# EAGLE board Clementina-Main (EAGLE 7.7.0)
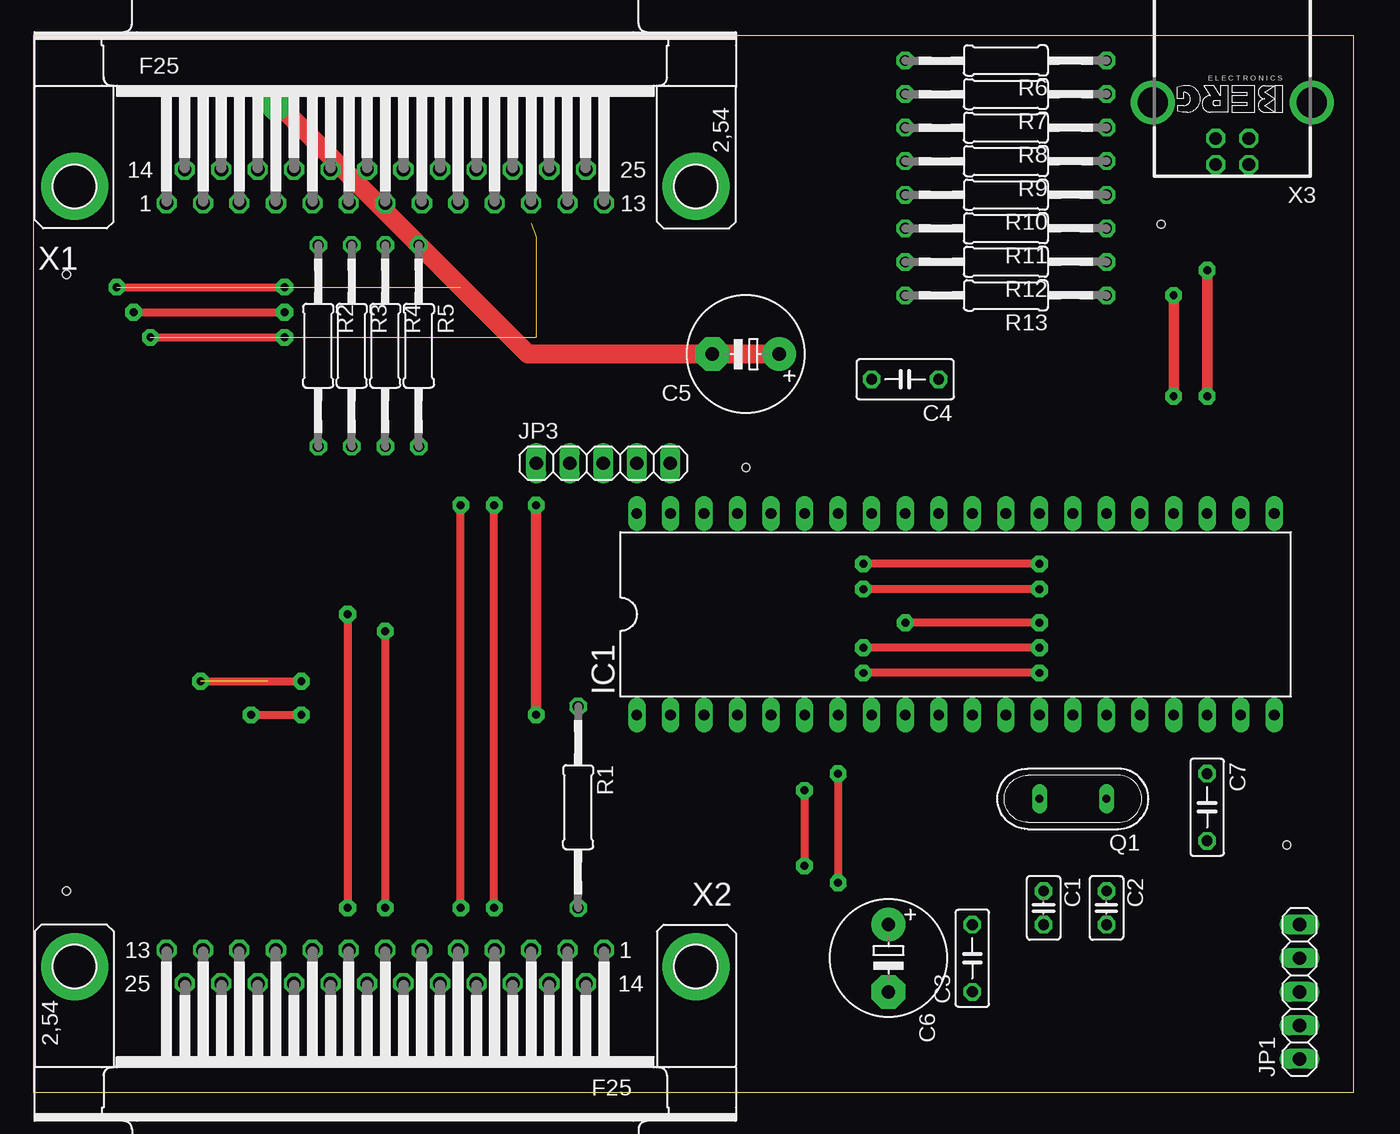
[diagram p0: board, top side]
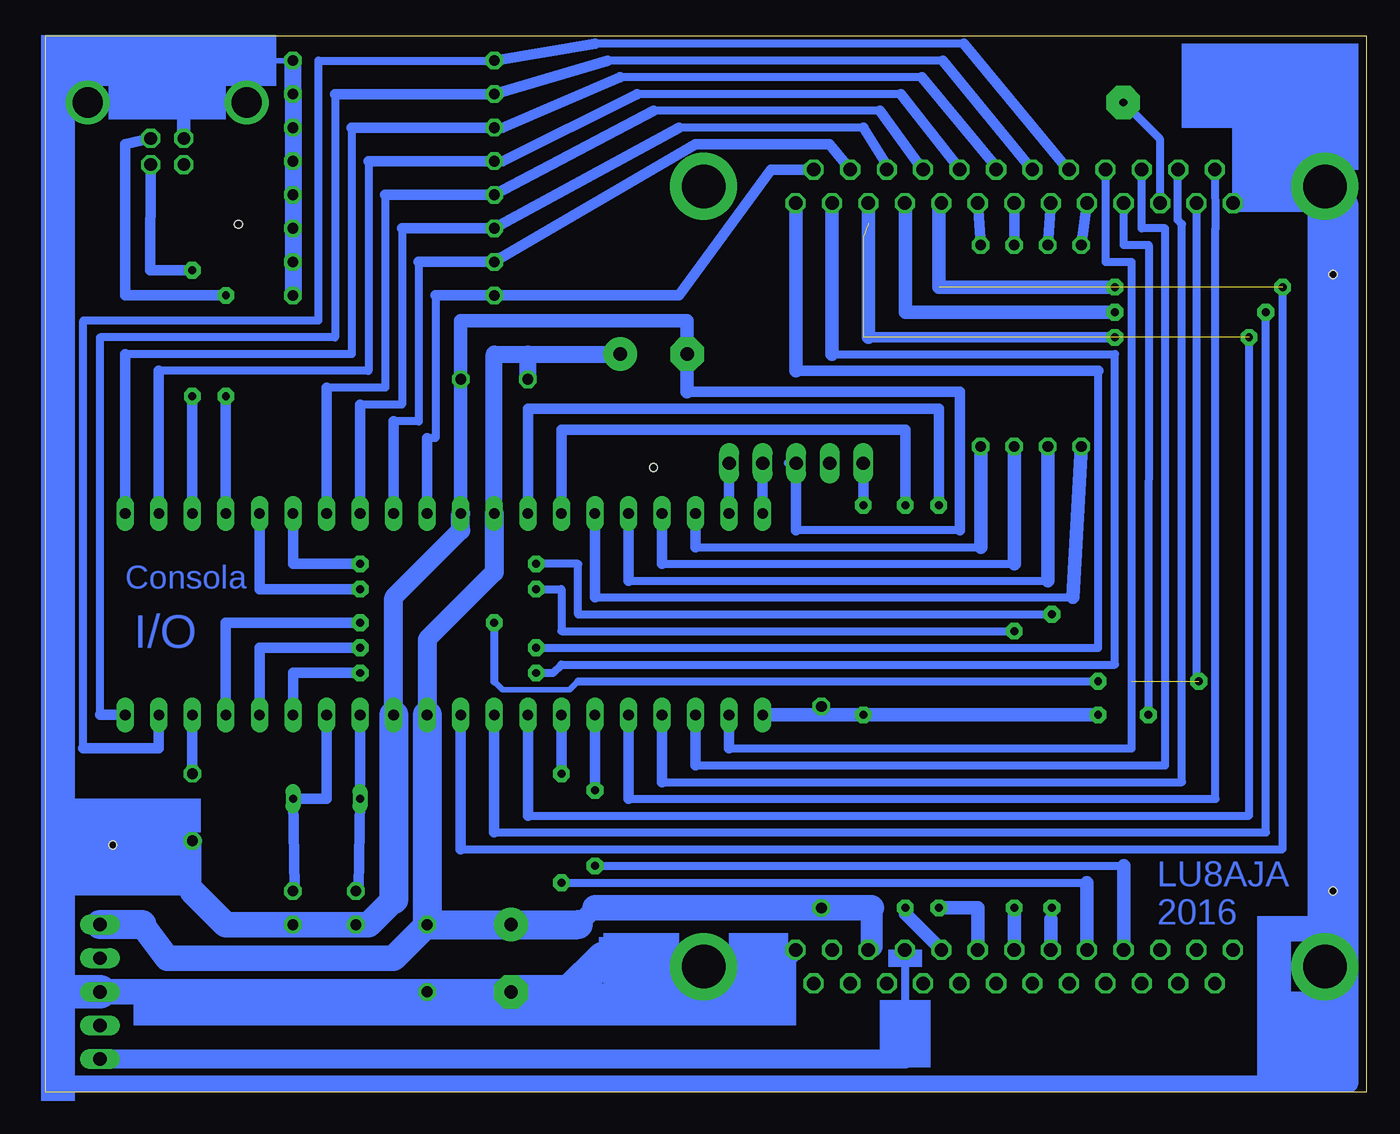
[diagram p1: board, bottom side, seen from below]

Size 100 x 80 mm. Coordinates in mm from the lower left corner, seen from the top.
Outline: 0,0 100,0 100,80 0,80 0,0
Copper layers (1*16): Top 0.035mm / dielectric 1.5mm / Bottom 0.035mm
Design rules "default": minimum track width 10mil, minimum drill 24mil, track to track 8mil, track to pad 8mil, pad to pad 8mil, via to via 8mil, smd to smd 8mil, copper to edge 40mil, drill to drill 8mil, minimum pad ring 10mil, minimum via ring 8mil, stop-mask expansion 4mil, vias tented up to drill 0mil, thermal gap 10mil
Holes 0.6 mm at 2.54,61.91 2.54,15.24 94.93,18.73 85.41,65.72 53.98,47.31

## Footprints (pad centres in the part's own frame; a part is rotated, then mirrored left to right if it is on the bottom)
C025-025X050 = drill 0.813 octagon: 1 -1.27,0; 2 1.27,0
C050-025X075 = drill 0.813 octagon: 1 -2.54,0; 2 2.54,0
C050-030X075 = drill 0.813 octagon: 1 -2.54,0; 2 2.54,0
E5-8,5 = drill 1.016 pad 2.54: + -2.54,0 | drill 1.016 pad 2.54 octagon: - 2.54,0
DIL40 = drill 0.813 long: 1 -24.13,-7.62; 2 -21.59,-7.62; 3 -19.05,-7.62; 4 -16.51,-7.62; 5 -13.97,-7.62; 6 -11.43,-7.62; 7 -8.89,-7.62; 8 -6.35,-7.62; 9 -3.81,-7.62; 10 -1.27,-7.62; 11 1.27,-7.62; 12 3.81,-7.62; 13 6.35,-7.62; 14 8.89,-7.62; 15 11.43,-7.62; 16 13.97,-7.62; 17 16.51,-7.62; 18 19.05,-7.62; 19 21.59,-7.62; 20 24.13,-7.62; 21 24.13,7.62; 22 21.59,7.62; 23 19.05,7.62; 24 16.51,7.62; 25 13.97,7.62; 26 11.43,7.62; 27 8.89,7.62; 28 6.35,7.62; 29 3.81,7.62; 30 1.27,7.62; 31 -1.27,7.62; 32 -3.81,7.62; 33 -6.35,7.62; 34 -8.89,7.62; 35 -11.43,7.62; 36 -13.97,7.62; 37 -16.51,7.62; 38 -19.05,7.62; 39 -21.59,7.62; 40 -24.13,7.62
1X05 = drill 1.016 long: 1 -5.08,0; 2 -2.54,0; 3 0,0; 4 2.54,0; 5 5.08,0
QS = drill 0.61 long: 1 -2.54,0; 2 2.54,0
0207/15 = drill 0.813 octagon: 1 -7.62,0; 2 7.62,0
F25HP = drill 1.016 octagon: 1 -16.561,-1.27; 2 -13.792,-1.27; 3 -11.049,-1.27; 4 -8.28,-1.27; 5 -5.512,-1.27; 6 -2.769,-1.27; 7 0,-1.27; 8 2.769,-1.27; 9 5.512,-1.27; 10 8.28,-1.27; 11 11.049,-1.27; 12 13.792,-1.27; 13 16.561,-1.27; 14 -15.189,1.27; 15 -12.421,1.27; 16 -9.652,1.27; 17 -6.909,1.27; 18 -4.14,1.27; 19 -1.372,1.27; 20 1.372,1.27; 21 4.14,1.27; 22 6.909,1.27; 23 9.652,1.27; 24 12.421,1.27; 25 15.189,1.27 | drill 3.302 pad 5.08: G1 -23.52,0; G2 23.52,0
PN61729-S = drill 0.95 octagon: 1 1.25,4.71; 2 -1.25,4.71; 3 -1.25,2.71; 4 1.25,2.71 | drill 2.3 pad 2.9: S1 -6.02,0; S2 6.02,0

## Placement (x,y rotation side)
C1  [C025-025X050]  76.52,13.97 270 top
C2  [C025-025X050]  81.28,13.97 270 top
C3  [C050-025X075]  71.12,10.16 90 top
C4  [C050-030X075]  66.04,53.98 180 top
C5  [E5-8,5]  53.98,55.88 180 top
C6  [E5-8,5]  64.77,10.16 270 top
C7  [C050-025X075]  88.9,21.59 270 top
IC1  PIC18F4550_40  [DIL40]  69.85,36.2 0 top
JP1  [1X05]  95.89,7.62 90 top
JP3  [1X05]  43.18,47.62 0 top
Q1  [QS]  78.74,22.23 180 top
R1  [0207/15]  41.27,21.59 270 top
R2  [0207/15]  21.59,56.52 270 top
R3  [0207/15]  24.13,56.52 270 top
R4  [0207/15]  26.67,56.52 270 top
R5  [0207/15]  29.21,56.52 270 top
R6  [0207/15]  73.66,78.11 180 top
R7  [0207/15]  73.66,75.56 180 top
R8  [0207/15]  73.66,73.03 180 top
R9  [0207/15]  73.66,70.48 180 top
R10  [0207/15]  73.66,67.94 180 top
R11  [0207/15]  73.66,65.41 180 top
R12  [0207/15]  73.66,62.87 180 top
R13  [0207/15]  73.66,60.33 180 top
X1  [F25HP]  26.67,68.58 0 top
X2  [F25HP]  26.67,9.53 180 top
X3  PN61729-S  [PN61729-S]  90.81,74.93 180 top

## Library data of the parts
C1-C3 C5-C7 R1-R13 = rcl
C4 = resistor
IC1 = microchip; MF: MICROCHIP; MPN: PIC18F4550-I/P; OC_FARNELL: 9321357; OC_NEWARK: 74K8623
JP1 JP3 = pinhead
Q1 = special
X1 X2 = con-subd; OC_FARNELL: unknown; OC_NEWARK: unknown
X3 = con-berg; OC_FARNELL: unknown; OC_NEWARK: unknown

## Nets
+5V: C3.2 C4.2 C5.+ C6.+ IC1.11 IC1.32 JP1.5 R1.2 X1.3 X2.3
GND: C1.2 C2.2 C3.1 C4.1 C5.- C6.- C7.2 IC1.12 IC1.31 JP1.3 JP3.3 R6.1 R7.1 R8.1 R9.1 R10.1 R11.1 R12.1 R13.1 X1.1 X2.1 X3.4 X3.S2
N$1: IC1.19 R6.2 X1.18
N$2: C2.1 IC1.14 Q1.1
N$3: IC1.1 JP3.1 R1.1 X1.4
N$4: IC1.8 X1.11
N$5: IC1.9 X1.10
N$6: IC1.10 X1.9
N$7: IC1.2 X1.17
N$8: IC1.3 X1.16
N$9: IC1.4 X1.15
N$10: IC1.5 X1.14
N$11: IC1.15 X1.12
N$12: C1.1 IC1.13 Q1.2
N$13: IC1.16 X1.13
N$14: IC1.17 X1.2
N$15: C7.1 IC1.18
N$16: IC1.20 R7.2 X1.19
N$17: IC1.21 R8.2 X1.20
N$18: IC1.22 R9.2 X1.21
N$19: IC1.27 R10.2 X1.22
N$20: IC1.28 R11.2 X1.23
N$21: IC1.29 R12.2 X1.24
N$22: IC1.30 R13.2 X1.25
N$23: IC1.35 R2.2
N$24: IC1.36 R3.2
N$25: IC1.37 R4.2
N$26: IC1.38 R5.2
N$27: IC1.24 X3.3
N$28: IC1.6 X2.10
N$29: IC1.7 X2.9
N$30: IC1.34 X2.5
N$31: IC1.33 X2.6
N$32: IC1.26 X2.8
N$33: IC1.25 X2.7
N$34: IC1.23 X3.2
N$35: JP1.1 X2.4
N$36: R5.1 X1.8
N$37: R4.1 X1.7
N$38: R3.1 X1.6
N$39: R2.1 X1.5
N$53: IC1.39 JP3.5
N$54: IC1.40 JP3.4

## Tracks (layer width: path | path; a pad name or v marks a point on that pad's centre or on a via)
+5V  (via drill 0.6 pad 2.54)
  Top 1.422: C5.+ 37.47,55.88 v18.41,74.93
  Bottom 0.61: X1.3 15.62,72.14 v18.41,74.93
  Bottom 1.27: IC1.32 66.04,55.88 63.5,55.88 | 63.5,55.88 C5.+ | C4.2 63.5,55.88
  Bottom 1.422: IC1.32 66.04,39.37 71.12,34.29 IC1.11 | 59.69,12.7 58.42,13.97 | 37.47,11.05 X2.3
  Bottom 1.676: 37.47,13.97 37.47,11.05
  Bottom 1.93: C3.2 73.66,10.16 90.81,10.16 92.71,12.7 | 58.42,13.97 R1.2 37.47,13.97
  Bottom 2.184: IC1.11 C3.2 C6.+ 59.69,12.7 | 92.71,12.7 JP1.5
GND
  Bottom 0.406: R6.1 85.09,78.11 | 85.09,78.11 89.53,78.11 99.06,78.11 | X3.S2 84.78,77.8 85.09,78.11 | 43.87,10.16 43.87,10.11 46.99,6.99 | 60.33,6.99 60.96,7.62 | C4.1 IC1.31
  Bottom 0.61: 30.8,42.55 43.18,42.55 | JP3.3 43.81,47.62
  Bottom 0.813: IC1.31 68.58,44.45 | 51.44,53.02 30.8,53.02 30.8,42.55 | 43.18,42.55 JP3.3
  Bottom 1.016: 68.58,44.45 C4.1 68.58,58.42 51.44,58.42 C5.- 51.44,53.02 | X3.4 89.56,78.08 89.53,78.11
  Bottom 1.27: X1.1 1.27,67.31 1.27,0.64 99.06,0.64 99.06,10.79 | R13.1 R12.1 R11.1 R10.1 R9.1 R8.1 R7.1 R6.1 | 99.06,78.11 99.06,19.05 99.06,13.97
  Bottom 1.422: 60.96,7.62 60.33,7.62 | 43.87,10.16 X2.1 | 98.42,7.62 99.06,8.26 99.06,10.79 99.06,13.97 | IC1.31 68.58,42.55 73.66,37.47 IC1.12 | 88.9,15.24 C7.2 99.06,19.05
  Bottom 1.93: C6.- C3.1 JP1.3 | 73.66,14.61 75.56,12.7 C1.2 C2.2 86.36,12.7 88.9,15.24
  Bottom 2.184: IC1.12 73.66,14.61
  Bottom 2.54: C6.- 60.96,7.62 | 60.33,7.62 57.78,10.16 | 46.99,6.99 60.33,6.99 | JP1.3 98.42,7.62
N$1
  Bottom 0.61: X1.18 22.86,70.18 | 30.48,79.38 58.42,79.38 | 97.16,26.04 97.16,58.42 79.38,58.42 79.38,78.11 R6.2
  Bottom 0.813: 22.86,70.18 30.48,79.38 | 58.42,79.38 R6.2 | IC1.19 91.44,26.04 97.16,26.04
N$2
  Bottom 0.813: IC1.14 78.74,22.23 Q1.1 81.15,15.37 C2.1
N$3  (via drill 0.6 pad 1.27)
  Top 0.61: v16.51,28.57 v20.32,28.57
  Top 0.813: v38.1,28.57 v38.1,44.45
  Bottom 0.61: v16.51,28.57 16.48,64.14 18.39,64.14 X1.4
  Bottom 0.813: v38.1,44.45 JP3.1 | 41.27,28.57 R1.1
  Bottom 1.016: IC1.1 41.27,28.57 v38.1,28.57 v20.32,28.57
N$4  (via drill 0.6 pad 1.27)  (3 unrouted)
  Top 0.61: v8.89,57.15 v19.05,57.15
  Bottom 0.61: 63.5,20.95 8.89,20.95 v8.89,57.15
  Bottom 0.813: IC1.8 63.5,20.95 | 37.72,57.15 v19.05,57.15
  Bottom 1.016: X1.11 37.72,57.15
N$5  (via drill 0.6 pad 1.27)
  Top 0.61: v7.62,59.05 v19.05,59.05
  Bottom 0.61: 66.04,19.68 7.62,19.68 v7.62,59.05 | 34.92,67.31 X1.10
  Bottom 0.813: IC1.9 66.04,19.68
  Bottom 1.016: 34.92,67.31 34.92,59.05 v19.05,59.05
N$6  (via drill 0.6 pad 1.27)  (1 unrouted)
  Top 0.61: v6.35,60.96 v19.05,60.96
  Bottom 0.61: 68.58,18.41 6.35,18.41 v6.35,60.96 | X1.9 32.38,67.11
  Bottom 0.813: IC1.10 68.58,18.41
  Bottom 1.016: 32.38,67.11 32.38,60.96 v19.05,60.96
N$7
  Bottom 0.61: 48.26,26.04 17.78,26.04 17.78,62.87 19.76,62.87 X1.17
  Bottom 0.813: IC1.2 48.26,26.04
N$8
  Bottom 0.61: 50.8,24.77 15.24,24.77 15.24,65.41 17.02,65.41 X1.16
  Bottom 0.813: IC1.3 50.8,24.77
N$9
  Bottom 0.61: 53.34,23.5 13.97,23.5 13.97,65.72 14.29,66.04 14.29,69.81 X1.15
  Bottom 0.813: IC1.4 53.34,23.5
N$10
  Bottom 0.61: 55.88,22.23 11.43,22.23 11.43,65.41 X1.14
  Bottom 0.813: IC1.5 55.88,22.23
N$11  (via drill 0.6 pad 1.27)
  Top 0.61: v76.2,31.75 v62.87,31.75
  Bottom 0.61: v62.87,31.75 61.59,31.75 60.96,32.38 19.05,32.38 19.05,55.88 40.46,55.88
  Bottom 0.813: IC1.15 81.28,31.75 v76.2,31.75
  Bottom 1.016: X1.12 40.46,55.88
N$12
  Bottom 0.813: IC1.13 Q1.2 76.33,15.43 C1.1
N$13  (via drill 0.6 pad 1.27)
  Top 0.61: v76.2,33.66 v62.87,33.66
  Bottom 0.61: v62.87,33.66 20.32,33.66 20.32,54.61 | 43.18,67.26 X1.13
  Bottom 0.813: IC1.16 83.82,33.66 v76.2,33.66 | 20.32,54.61 43.18,54.61
  Bottom 1.016: 43.18,54.61 43.18,67.26
N$14  (via drill 0.6 pad 1.27)  (1 unrouted)
  Top 0.61: v76.2,35.56 v66.04,35.56 | v12.7,31.11 v20.32,31.11
  Bottom 0.406: 66.04,31.11 65.41,30.48 60.33,30.48 59.69,31.11
  Bottom 0.61: v66.04,35.56 66.04,31.11 | X1.2 12.88,31.11 v12.7,31.11 | 59.69,31.11 v20.32,31.11
  Bottom 0.813: IC1.17 86.36,35.56 v76.2,35.56
N$15
  Bottom 0.813: IC1.18 C7.1
N$16
  Bottom 0.61: X1.19 25.4,69.95 | 32.07,78.11 57.47,78.11 | 95.89,28.57 95.89,57.15 78.11,57.15 78.11,75.56
  Bottom 0.813: 25.4,69.95 32.07,78.11 | 57.47,78.11 R7.2 78.11,75.56 | IC1.20 95.89,28.57
N$17
  Bottom 0.406: 65.41,73.03 R8.2
  Bottom 0.61: X1.20 27.94,69.95 | 33.66,76.83 56.52,76.83 | 76.83,73.03 76.83,55.88 93.98,55.88
  Bottom 0.813: 27.94,69.95 33.66,76.83 | 56.52,76.83 65.41,73.03 | IC1.21 93.98,55.88 | 76.83,73.03 R8.2
N$18
  Bottom 0.406: 65.41,70.48 R9.2
  Bottom 0.61: X1.21 30.8,69.86 | 35.24,75.56 55.24,75.56 | 75.56,70.48 75.56,54.61 91.44,54.61
  Bottom 0.813: 30.8,69.86 35.24,75.56 | 55.24,75.56 65.41,70.48 | IC1.22 91.44,54.61 | 75.56,70.48 R9.2
N$19
  Bottom 0.61: X1.22 33.66,69.93 | 36.83,74.3 53.98,74.3 | 74.3,67.94 74.3,53.34 78.74,53.34
  Bottom 0.813: 33.66,69.93 36.83,74.3 | 53.98,74.3 R10.2 74.3,67.94 | 78.74,53.34 IC1.27
N$20
  Bottom 0.61: X1.23 36.2,69.98 | 38.1,73.03 52.07,73.03 | 73.03,65.41 73.03,52.07 76.2,52.07
  Bottom 0.813: 36.2,69.98 38.1,73.03 | 52.07,73.03 R11.2 73.03,65.41 | 76.2,52.07 IC1.28
N$21
  Bottom 0.61: 71.75,62.87 71.75,50.8 73.66,50.8
  Bottom 0.813: X1.24 40.68,71.75 50.8,71.75 R12.2 71.75,62.87 | 73.66,50.8 IC1.29
N$22
  Bottom 0.61: 70.48,60.33 70.48,49.53 71.12,49.53
  Bottom 0.813: X1.25 45.09,69.85 52.07,60.33 R13.2 70.48,60.33 | 71.12,49.53 IC1.30
N$23
  Bottom 0.61: 58.42,37.47 22.23,37.47
  Bottom 0.813: IC1.35 58.42,37.47
  Bottom 1.016: 22.23,37.47 R2.2
N$24
  Bottom 0.61: 55.88,38.73 24.13,38.73
  Bottom 0.813: IC1.36 55.88,38.73
  Bottom 1.016: R3.2 24.13,38.73
N$25
  Bottom 0.61: 53.34,40.01 26.67,40.01
  Bottom 0.813: IC1.37 53.34,40.01
  Bottom 1.016: R4.2 26.67,40.01
N$26
  Bottom 0.61: 50.8,41.27 29.21,41.27
  Bottom 0.813: IC1.38 50.8,41.27
  Bottom 1.016: R5.2 29.21,41.27
N$27  (via drill 0.6 pad 1.27)
  Top 0.813: v86.36,52.7 v86.36,60.33
  Bottom 0.813: IC1.24 v86.36,52.7 | v86.36,60.33 93.98,60.33 93.98,71.75 X3.3
N$28  (via drill 0.6 pad 1.27)
  Top 0.61: v58.42,22.86 v58.42,17.14
  Bottom 0.61: v58.42,17.14 18.39,17.14
  Bottom 0.813: IC1.6 v58.42,22.86
  Bottom 1.016: 18.39,17.14 X2.10
N$29  (via drill 0.6 pad 1.27)
  Top 0.61: v60.96,24.13 v60.96,15.88
  Bottom 0.61: v60.96,15.88 21.16,15.88
  Bottom 0.813: IC1.7 v60.96,24.13
  Bottom 1.016: 21.16,15.88 X2.9
N$30  (via drill 0.6 pad 1.27)
  Top 0.61: v34.92,13.97 v34.92,44.45
  Bottom 0.61: v34.92,13.97 34.92,13.54
  Bottom 0.813: IC1.34 60.96,50.16 34.92,50.16 v34.92,44.45
  Bottom 1.016: 34.92,13.54 X2.5
N$31  (via drill 0.6 pad 1.27)
  Top 0.61: v32.38,13.97 v32.38,44.45
  Bottom 0.813: IC1.33 63.5,51.75 32.38,51.75 v32.38,44.45
  Bottom 1.016: v32.38,13.97 29.44,13.97 X2.6
N$32  (via drill 0.6 pad 1.27)
  Top 0.61: v76.2,40.01 v62.87,40.01 | v23.81,36.2 v23.81,13.97
  Bottom 0.61: v23.81,36.2 59.69,36.2 59.69,40.01 v62.87,40.01 | v23.81,13.97 23.9,13.11
  Bottom 0.813: IC1.26 81.28,40.01 v76.2,40.01
  Bottom 1.016: 23.9,13.11 X2.8
N$33  (via drill 0.6 pad 1.27)
  Top 0.61: v26.67,34.92 v26.67,13.97 | v76.2,38.1 v62.87,38.1
  Bottom 0.61: v62.87,38.1 60.96,38.1 60.96,34.92 v26.67,34.92
  Bottom 0.813: IC1.25 83.82,38.1 v76.2,38.1
  Bottom 1.016: v26.67,13.97 X2.7
N$34  (via drill 0.6 pad 1.27)
  Top 0.813: v88.9,52.7 v88.9,62.23
  Bottom 0.813: IC1.23 v88.9,52.7 | v88.9,62.23 92.08,62.23 X3.2
N$35
  Bottom 0.61: 34.92,5.71 34.92,10.77 X2.4
  Bottom 1.27: 34.92,2.54 34.92,5.71
  Bottom 1.422: JP1.1 34.92,2.54
N$36
  Bottom 0.813: X1.8 R5.1
N$37
  Bottom 0.813: X1.7 R4.1
N$38
  Bottom 0.813: X1.6 R3.1
N$39
  Bottom 0.813: X1.5 R2.1
N$53
  Bottom 0.813: JP3.5 IC1.39
N$54
  Bottom 0.813: JP3.4 IC1.40
(copper drawn outside any net)
  shapes: Bottom area x19

## Text on the board
Bottom: Consola | I/O | LU8AJA / 2016